# Altium PCB MyProject.PcbDoc
Units mm, origin at the board's own origin, x right, y up, seen from the top; angles counter-clockwise.
Board outline 150.29 x 86.79 mm, 2 copper layers (Top Layer, Bottom Layer); 43 components, 50 nets, 178 pads, 24 vias.
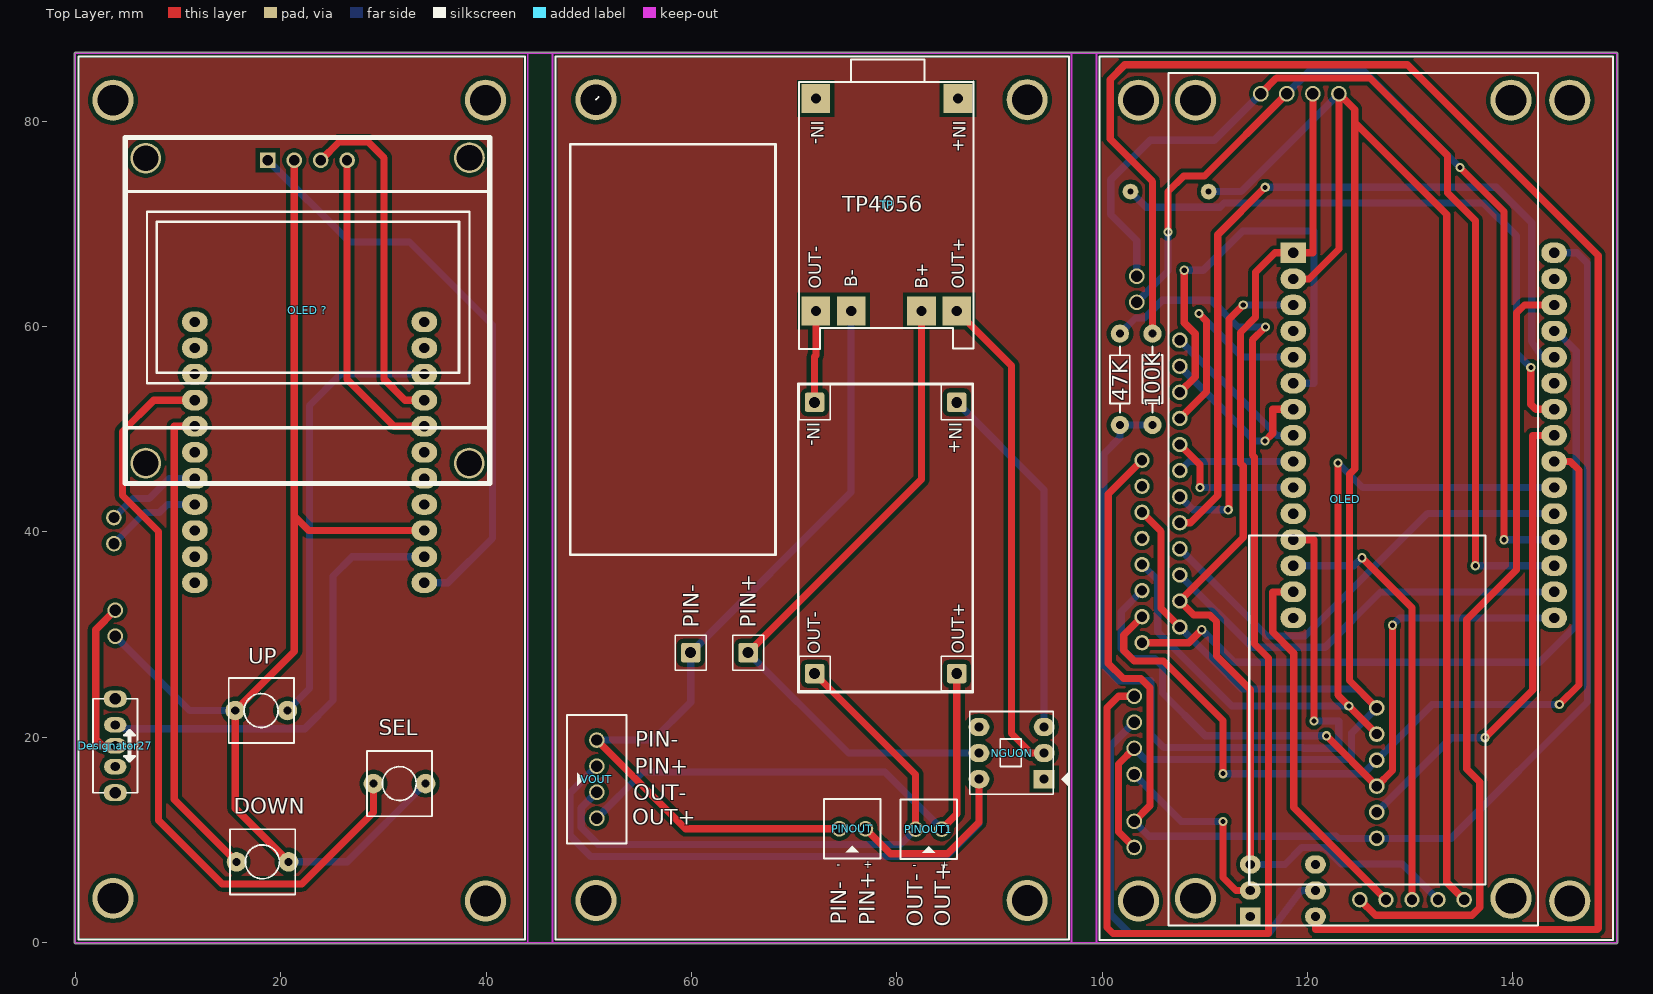
[diagram p0: Top Layer view]
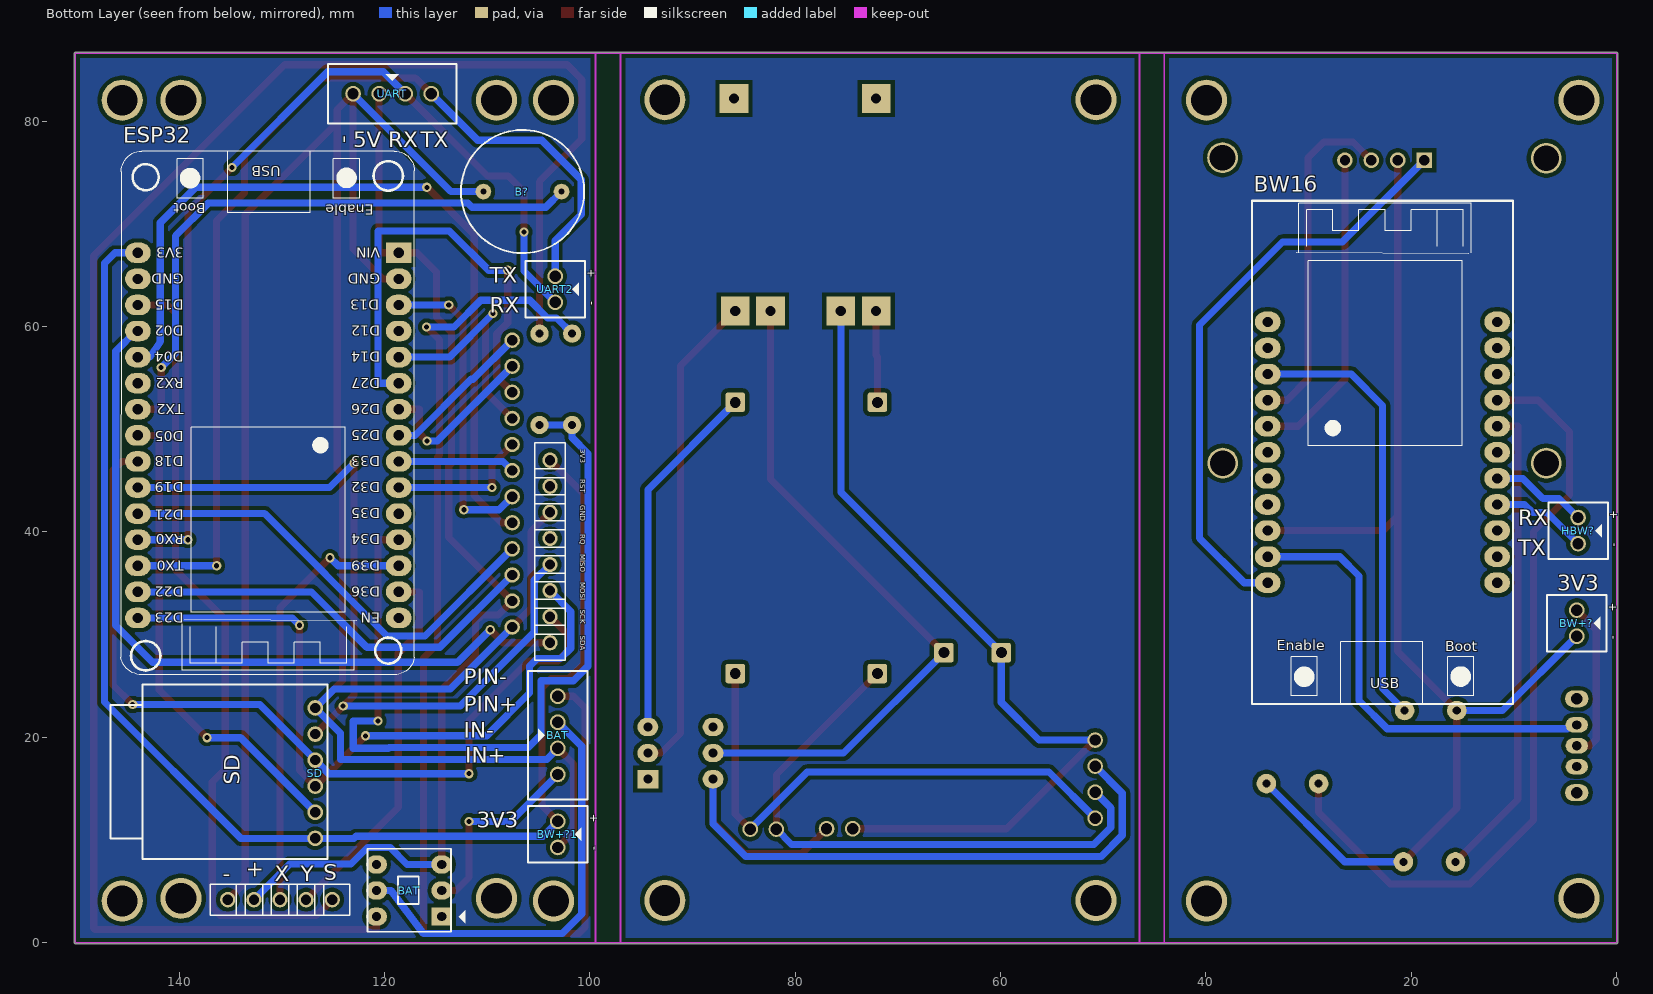
[diagram p1: Bottom Layer view, seen from below]

## Layer stack, top to bottom
Top Solder: solder mask 0.0102, Solder Resist, Dk 3.5
Top Layer: signal copper 0.0356
Dielectric 1: dielectric 0.32, FR-4, Dk 4.8
Bottom Layer: signal copper 0.0356
Bottom Solder: solder mask 0.0102, Solder Resist, Dk 3.5

## Board outline
0,-0.089 cw(c0,0) -0.089,0 -0.089,86.614 cw(c0,86.614) 0,86.703 150.114,86.703 cw(c150.114,86.614) 150.203,86.614 150.203,0 cw(c150.114,0) 150.114,-0.089

## Design rules (kind name [scope] priority, off if disabled: settings)
Clearance [All] p1: gap=0.4 ignorepadtopadclearanceinfootprint=FALSE
DiffPairsRouting [All] p1: maxlimit=0.3 minlimit=0.3 mostfreqgap=0.3 toplayer_minwidth=0.381 toplayer_maxwidth=0.381 toplayer_prefwidth=0.381 bottomlayer_minwidth=0.381 bottomlayer_maxwidth=0.381 bottomlayer_prefwidth=0.381 maxuncoupledlength=12.7
PolygonConnect [All] p1: connectstyle=Relief reliefconductorwidth=0.254 reliefentries=4 polygonreliefangle="90 Angle" airgapwidth=0.254
RoutingCorners [All] p1: cornerstyle=45-Degree minsetback=0 maxsetback=3
RoutingVias [All] p1: holewidth=0.5 width=0.9 viastyle="Through Hole" minholewidth=0.5 minwidth=0.9 maxholewidth=0.5 maxwidth=0.9
SolderMaskExpansion [All] p1: expansion=0.102 istentingtop=FALSE
Width [All] p1: maxlimit=0.7 minlimit=0.7 preferedwidth=0.7
28 further rules are at their usual default settings.

## Classes and differential pairs
component class MyProject: 100K + B? BAT BW16 BW+? DOWN ESP32 HBW? OLED "OLED ?" SD SEL UART UART2 UP X Y

## Components (designator, comment, footprint, x,y, rotation, side; value= is the part's Value field where it differs from the comment)
3V3 "Header 1" HEAD1#1 103.886,46.99 r270 bottom (schematic designator GND)
47K "47K" R1/4W 101.727,59.309 r270 top value="R1/4W - 1K"
100K "100K" R1/4W 104.902,50.419 r90 top value="R1/4W - 1K"
+ "Header 1" HEAD1#1 132.715,4.191 r180 bottom (schematic designator 5V)
- "Header 1" HEAD1#1 135.255,4.191 r180 bottom (schematic designator GND)
B? "BUZZ" BUZZ 110.363,73.152 r180 bottom
BAT "Header 4" "Header 4" 103.124,20.193 r270 bottom
BAT "SW6" SW6 114.427,2.54 r0 bottom
BW16 "BW16-KIT" BW16-KIT 35.514,23.252 r180 bottom
BW+? "HD2" "Header 2" 3.891,31.115 r90 bottom
BW+?1 "HD2" "Header 2" 103.124,10.541 r90 bottom (schematic designator BW+?)
Designator27 "Comment" SW102 3.891,17.145 r90 top
DOWN "SW" SW2 15.702,7.874 r0 top value="SW chip 2 pin" (schematic designator DOWN?)
ESP32 "ESP32_30" ESP32_30 117.094,77.089 r0 bottom
GND "Header 1" HEAD1#2 103.886,41.91 r270 bottom (schematic designator VRX)
HBW? "HD2" "Header 2" 3.764,40.132 r90 bottom
MISO "Header 1" HEAD1#3 103.886,36.83 r270 bottom (schematic designator 5V)
MOSI "Header 1" HEAD1#4 103.886,34.29 r270 bottom (schematic designator VRX)
NGUON "SW6" SW6 94.353,15.923 r180 top
OLED "OLED_BTN" OLED_BTN 142.494,1.651 r90 top
"OLED ?" "OLED 1.3inch" "OLED 1.3inch" 4.86,44.7 r0 top
PIN+ "Header 1" HEAD1#5 65.524,28.242 r270 top
PIN- "Header 1" HEAD1#6 85.844,26.21 r270 top
PIN- "Header 1" HEAD1#7 72.001,26.21 r270 top
PIN- "Header 1" HEAD1#8 85.844,52.626 r270 top
PIN- "Header 1" HEAD1#5 72.001,52.626 r270 top
PIN- "Header 1" HEAD1#5 59.936,28.242 r270 top
PINOUT "HD2" "Header 2" 75.684,11.097 r0 top
PINOUT1 "HD2" "Header 2" 83.108,11.057 r0 top (schematic designator PINOUT)
RQ "Header 1" HEAD1#9 103.886,39.37 r270 bottom (schematic designator GND)
RST "Header 1" HEAD1#10 103.886,44.45 r270 bottom (schematic designator 5V)
S "Header 1" HEAD1#1 125.095,4.191 r180 bottom (schematic designator SW)
SCK "Header 1" HEAD1#11 103.886,31.75 r270 bottom (schematic designator VRY)
SD "SD" SD 125.603,8.128 r90 bottom
SDA "Header 1" HEAD1#12 103.886,29.21 r270 bottom (schematic designator SW)
SEL "SW" SW2 29.037,15.494 r0 top value="SW chip 2 pin" (schematic designator SEL?)
TP "TP4056" TP4056 70.477,57.833 r0 top
UART "Header 4" "Header 4" 119.253,82.677 r0 bottom
UART2 "HD2" "Header 2" 103.378,63.627 r90 bottom
UP "SW" SW2 15.575,22.606 r0 top value="SW chip 2 pin" (schematic designator UP?)
VOUT "Header 4" "Header 4" 50.792,15.923 r270 top
X "Header 1" HEAD1#1 130.175,4.191 r180 bottom (schematic designator VRX)
Y "Header 1" HEAD1#1 127.635,4.191 r180 bottom (schematic designator VRY)

## Footprints (in the part's own frame and the unit in brackets; to place one, negate y for a bottom-side part, rotate by r counter-clockwise, add the part's x,y. Pads: shape width x height; smd on the part's side, far side on the other; paste and mask are expansions set on the pad)
BUZZ [mil]
  round 60 hole 23.62: 1(0,0) 2(299.21,0)
  silkscreen extent -86,-236 386,236
BW16-KIT [mm]
  oval 2.5x2 hole 1: 1(1.524,37.2) 2(1.524,34.66) 3(1.524,32.12) 4(1.524,29.58) 5(1.524,27.04) 6(1.524,24.5) 7(1.524,21.96) 8(1.524,19.42) 9(1.524,16.88) 10(1.524,14.34) 11(1.524,11.8) 12(23.876,11.8) 13(23.876,14.34) 14(23.876,16.88) 15(23.876,19.42) 16(23.876,21.96) 17(23.876,24.5) 18(23.876,27.04) 19(23.876,29.58) 20(23.876,32.12) 21(23.876,34.66) 22(23.876,37.2)
  silkscreen extent 0,0 25.4,49
ESP32_30 [mm] "Microcontoller Board 30 Pins Wifi 2.4GHz BLE 4.2 ESP32-WROOM-32D"
  oval 2.5x2 hole 1: 1(1.524,45.466) 2(1.524,42.926) 3(1.524,40.386) 4(1.524,37.846) 5(1.524,35.306) 6(1.524,32.766) 7(1.524,30.226) 8(1.524,27.686) 9(1.524,25.146) 10(1.524,22.606) 11(1.524,20.066) 12(1.524,17.526) 13(1.524,14.986) 14(1.524,12.446) 16(26.924,45.466) 17(26.924,42.926) 18(26.924,40.386) 19(26.924,37.846) 20(26.924,35.306) 21(26.924,32.766) 22(26.924,30.226) 23(26.924,27.686) 24(26.924,25.146) 25(26.924,22.606) 26(26.924,20.066) 27(26.924,17.526) 28(26.924,14.986) 29(26.924,12.446) 30(26.924,9.906)
  rect 2.5x2 hole 1: 15(1.524,9.906)
  silkscreen extent -0.01,0 28.57,51, body extent 0.07,0.08 28.57,50.98, height 7
HEAD1#1 [mm] "Connector Socket with header, Single-row 1-position, 0.100\" pitch"
  round 1.5 hole 1: 1(0,0)
  silkscreen extent -1.7,-1.5 1.7,1.5, body extent -1.46,-1.27 1.46,1.27, height 10.36
HEAD1#2 [mm] "Connector Socket with header, Single-row 1-position, 0.100\" pitch"
  round 1.5 hole 1: 3(0,0)
  silkscreen extent -1.7,-1.5 1.7,1.5, body extent -1.46,-1.27 1.46,1.27, height 10.36
HEAD1#3 [mm] "Connector Socket with header, Single-row 1-position, 0.100\" pitch"
  round 1.5 hole 1: 5(0,0)
  silkscreen extent -1.7,-1.5 1.7,1.5, body extent -1.46,-1.27 1.46,1.27, height 10.36
HEAD1#4 [mm] "Connector Socket with header, Single-row 1-position, 0.100\" pitch"
  round 1.5 hole 1: 6(0,0)
  silkscreen extent -1.7,-1.5 1.7,1.5, body extent -1.46,-1.27 1.46,1.27, height 10.36
HEAD1#5 [mm] "Connector Socket with header, Single-row 1-position, 0.100\" pitch"
  rrect25% 1.905x1.905 hole 1.067: 1(0,0)
  silkscreen extent -1.7,-1.5 1.7,1.5, body extent -1.46,-1.27 1.46,1.27, height 10.36
HEAD1#6 [mm] "Connector Socket with header, Single-row 1-position, 0.100\" pitch"
  rrect25% 1.905x1.905 hole 1.067: 3(0,0)
  silkscreen extent -1.7,-1.5 1.7,1.5, body extent -1.46,-1.27 1.46,1.27, height 10.36
HEAD1#7 [mm] "Connector Socket with header, Single-row 1-position, 0.100\" pitch"
  rrect25% 1.905x1.905 hole 1.067: 4(0,0)
  silkscreen extent -1.7,-1.5 1.7,1.5, body extent -1.46,-1.27 1.46,1.27, height 10.36
HEAD1#8 [mm] "Connector Socket with header, Single-row 1-position, 0.100\" pitch"
  rrect25% 1.905x1.905 hole 1.067: 2(0,0)
  silkscreen extent -1.7,-1.5 1.7,1.5, body extent -1.46,-1.27 1.46,1.27, height 10.36
HEAD1#9 [mm] "Connector Socket with header, Single-row 1-position, 0.100\" pitch"
  round 1.5 hole 1: 4(0,0)
  silkscreen extent -1.7,-1.5 1.7,1.5, body extent -1.46,-1.27 1.46,1.27, height 10.36
HEAD1#10 [mm] "Connector Socket with header, Single-row 1-position, 0.100\" pitch"
  round 1.5 hole 1: 2(0,0)
  silkscreen extent -1.7,-1.5 1.7,1.5, body extent -1.46,-1.27 1.46,1.27, height 10.36
HEAD1#11 [mm] "Connector Socket with header, Single-row 1-position, 0.100\" pitch"
  round 1.5 hole 1: 7(0,0)
  silkscreen extent -1.7,-1.5 1.7,1.5, body extent -1.46,-1.27 1.46,1.27, height 10.36
HEAD1#12 [mm] "Connector Socket with header, Single-row 1-position, 0.100\" pitch"
  round 1.5 hole 1: 8(0,0)
  silkscreen extent -1.7,-1.5 1.7,1.5, body extent -1.46,-1.27 1.46,1.27, height 10.36
"Header 2" [mil]
  round 60 hole 43.31: 1(50,0) 2(-50,0)
  silkscreen extent -108,-114 108,114
"Header 4" [mil]
  round 60 hole 43.31: 1(150,0) 2(50,0) 3(-50,0) 4(-150,0)
  silkscreen extent -246,-114 246,114
"OLED 1.3inch" [mm] "OLED"
  rect 1.524x1.524 hole 1: 1(13.89,31.5)
  round 1.524 hole 1: 2(16.463,31.5) 3(19.037,31.5) 4(21.61,31.5)
  round 3 hole 2.5: Hole(2,2) Hole(2,31.7) Hole(33.5,2) Hole(33.528,31.75)
  silkscreen extent -0.07,0 35.5,33.7
OLED_BTN [mm]
  round 1.5 hole 1: 1(29.083,34.925) 2(31.623,34.925) 3(34.163,34.925) 4(36.703,34.925) 5(39.243,34.925) 6(41.783,34.925) 7(44.323,34.925) 8(46.863,34.925) 9(49.403,34.925) 10(51.943,34.925) 11(54.483,34.925) 12(57.023,34.925)
  round 4 hole 3: Hole(2.667,33.401) Hole(2.667,2.667) Hole(80.391,2.667) Hole(80.391,33.401)
  silkscreen extent 0.03,0.03 83.03,36.03
R1/4W [mil] "R 1/4W, 2 Pin, 350mil"
  round 70 hole 31: 1(0,0) 2(350,0)
  silkscreen extent 48,-38 302,38, body extent -40,-47 386,47, height 111
SD [mil]
  round 60 hole 39.37: 1(80,45) 2(180,45) 3(280,45) 4(380,45) 5(480,45) 6(580,45)
  silkscreen extent 0,-2 670,830
SW2 [mil] "SW button 2pin, 250x 250 mil"
  round 75 hole 31: 1(0,0) 2(200,0)
  silkscreen extent -25,-125 225,125, body extent -60,-163 255,157, height 257
SW6 [mil] "SW DTDP - 6Pin 260x300x300 mil"
  rect 80x70 hole 35: 1(0,0)
  oval 80x70 hole 35: 2(0,-100) 3(0,-200) 4(250,-200) 5(250,-100) 6(250,0)
  silkscreen extent -90,-260 285,58, body extent -33,-259 281,55, height 532
SW102 [mil] "Switch 102 On Board nho"
  oval 60x85 hole 35: 1(0,0) 2(80,0) 3(160,0)
  oval 65x90 hole 45: 4(260,0) 5(-100,0)
  silkscreen extent -100,-85 260,85
TP4056 [mm]
  rect 2.79x2.79 hole 1: 1(1.651,3.683) 2(5.08,3.683) 3(11.938,3.683) 4(15.367,3.683) 5(15.494,24.384) 6(1.651,24.384)
  silkscreen extent 0,0 17,28.19

## Part data
3V3 + - GND MISO MOSI PIN+ PIN- PIN- PIN- PIN- PIN- RQ RST S SCK SDA X Y: "Header, 1-Pin, Right Angle", Published=6-May-2014, Publisher="Cynetik Group", Revised="Zion Blue"
47K 100K: library part R1/4W, "Resistor 1/4W"
B?: library part Buzz
BAT NGUON: "SW-DTDP - 6 Pin"
BW+? BW+?1 HBW? PINOUT PINOUT1 UART2: library part "Header 2"
DOWN SEL UP: library part SW2, "Switch button 2 pin"
ESP32: "Microcontoller Board 30 Pins Wifi 2.4GHz BLE 4.2 ESP32-WROOM-32D", ComponentLink1Description=Datasheet, ComponentLink1URL=https://www.mouser.com/datasheet/2/891/esp32_wroom_32d_esp32_wroom_32u_datasheet_en-1365844.pdf

## Free pads (board coordinates)
  round 4 hole 3: Hole(3.674,4.318) Hole(3.674,82.042) Hole(39.959,4.064) Hole(39.959,4.064) Hole(39.959,82.042) Hole(39.959,82.042) Hole(39.959,82.042) Hole(50.702,4.112) Hole(50.702,82.09) Hole(92.702,4.112) Hole(92.702,82.09) Hole(103.542,4.064) Hole(103.542,82.042) Hole(139.827,4.318) Hole(139.827,4.318) Hole(139.827,82.042) Hole(145.542,4.064) Hole(145.542,82.042)

## Via types
v1: diameter 0.9, hole 0.5, Top Layer to Bottom Layer, 24 vias

## Nets (pads, with @x,y where several pads share a name; then routed paths per layer and width w, separated by ;. In a path a pad name is that pad's centre, name@x,y a point inside that pad or via, vN(x,y) a via of type N, cw(c..) or ccw(c..) an arc to the next point about the centre after c; other vN are vias at no path point)
3V3: 3V3.1 BW+?1.1 ESP32.30 SD.1 | length 136.6
  Top Layer w0.7: BW+?1.1 104.648,13.335 104.648,24.841 103.768,25.721 102.069,25.721 100.599,27.19 100.599,43.703 3V3.1
  Bottom Layer w0.7: BW+?1.1 104.576,10.359 122.766,10.359 122.965,10.16 SD.1 133.992,10.16 147.277,23.445 147.277,66.159 146.253,67.183 ESP32.30
3V3-1: BW+?.1 Designator27.2 | length 15.5
  Top Layer w0.7: Designator27.2 2.621,19.177 1.986,19.812 1.986,30.48 BW+?.1
3V3-BW: BW16.10 Designator27.3 | length 44.3
  Bottom Layer w0.7: Designator27.3 4.431,21.209 4.812,20.828 22.356,20.828 25.1,23.571 25.1,35.712 26.979,37.592 BW16.10
5V: "OLED ?.1" BW16.11 | length 57.7
  Bottom Layer w0.7: 18.75,76.2 26.725,68.224 32.542,68.224 40.619,60.147 40.619,39.395 36.276,35.052 BW16.11
+5: +.1 BAT.3@114.427,7.62 ESP32.15 OLED.2 UART.2 | length 107.6
  Top Layer w0.7: BAT.3@114.427,7.62 114.427,24.651 111.138,27.94 111.138,31.267 110.49,31.916 108.927,31.916 OLED.2 113.747,39.452 113.747,46.396 113.469,46.674 113.469,59.431 114.941,60.903 114.941,65.284 116.84,67.183 ESP32.15 120.523,67.183 UART.2
  Bottom Layer w0.7: BAT.3@114.427,7.62 117.805,7.62 119.444,9.259 121.666,9.259 123.254,7.671 129.235,7.671 +.1
BW-: "OLED ?.2" BW16.9 BW+?.2 DOWN.2 SEL.2 UP.1 | length 117.3
  Top Layer w0.7: DOWN.2 15.575,13.081 UP.1 21.323,28.354 21.323,41.546 ; 21.323,76.2 21.323,41.546 ; BW16.9 22.737,40.132 21.323,41.546
  Bottom Layer w0.7: BW+?.2 11.13,22.606 UP.1 ; DOWN.2 26.497,7.874 SEL.2
C1: ESP32.26 OLED.5 | length 78.7
  Top Layer w0.7: OLED.5 108.61,40.894 111.269,43.553 111.269,68.953 v1(115.875,73.558)
  Bottom Layer w0.7: v1(115.875,73.558) 138.379,73.558 141.834,70.104 141.834,58.553 142.83,57.023 ESP32.26
C2: ESP32.13 OLED.6 | length 30.7
  Top Layer w0.7: v1(112.276,42.164) 112.369,42.257 112.369,60.731 v1(113.741,62.103)
  Bottom Layer w0.7: OLED.6 108.839,42.164 v1(112.276,42.164) ; v1(113.741,62.103) ESP32.13
C3: ESP32.7 OLED.7 | length 11.4
  Bottom Layer w0.7: OLED.7 108.458,46.863 ESP32.7
C4: ESP32.6 OLED.8 | length 14.1
  Top Layer w0.7: OLED.8 109.535,46.548 v1(109.535,44.323)
  Bottom Layer w0.7: v1(109.535,44.323) ESP32.6
CLK: ESP32.22 SCK.7 SD.4 | length 83.6
  Top Layer w0.7: SCK.7 102.108,29.972 102.108,28.448 103.124,27.432 105.969,27.432 111.76,21.641 v1(111.76,16.459) ; ESP32.22 145.593,46.863 146.431,46.025 146.431,25.095 v1(144.526,23.19)
  Bottom Layer w0.7: v1(111.76,16.459) 125.425,16.459 SD.4 132.156,23.19 v1(144.526,23.19)
CS: ESP32.23 SD.2 | length 47
  Top Layer w0.7: v1(137.287,19.964) 141.935,24.613 141.935,49.403 ESP32.23
  Bottom Layer w0.7: SD.2 134.01,19.964 v1(137.287,19.964)
GND: -.1 B?.1 BAT.2@103.124,18.923 BW+?1.2 ESP32.14 GND.3 OLED.1 SD.6 UART.1 | length 253
  Top Layer w0.7: BW+?1.2 101.6,10.795 101.6,17.399 BAT.2@103.124,18.923 ; GND.3 105.74,40.056 105.74,32.563 OLED.1 ; ESP32.14 120.142,64.643 123.063,67.564 UART.1 124.595,81.145 124.595,79.873 ; SD.6 124.079,25.527 124.079,45.611 124.595,46.126 124.595,79.873 ; -.1 133.553,5.893 133.553,70.914 124.595,79.873
  Bottom Layer w0.7: BAT.2@103.124,18.923 104.205,17.842 124.281,17.842 124.281,20.395 SD.6 124.902,24.704 113.599,24.704 OLED.1 ; B?.1 113.538,73.152 UART.1
GND1: PIN-.4 PINOUT1.2 VOUT.2 | length 57.2
  Top Layer w0.7: PIN-.4 81.838,16.372 PINOUT1.2
  Bottom Layer w0.7: VOUT.2 49.268,13.129 49.268,11.224 50.919,9.573 80.354,9.573 PINOUT1.2
IO34: 47K.2 100K.1 ESP32.4 | length 81.3
  Top Layer w0.7: ESP32.4 120.625,39.243 v1(120.625,21.59)
  Bottom Layer w0.7: 100K.1 47K.2 101.727,49.174 100.197,47.644 100.197,26.918 101.6,25.515 104.75,25.515 104.75,20.244 105.993,19.001 119.564,19.001 119.622,18.942 123.044,18.942 123.044,21.59 v1(120.625,21.59)
MISO: ESP32.21 MISO.5 SD.5 | length 78.8
  Top Layer w0.7: v1(122.961,46.711) 122.961,24.105 v1(124.028,23.038) SD.5
  Bottom Layer w0.7: MISO.5 105.41,35.306 105.41,30.251 112.624,23.038 v1(124.028,23.038) ; v1(122.961,46.711) 125.349,44.323 ESP32.21
MOSI: ESP32.16 MOSI.6 SD.3 | length 70.8
  Top Layer w0.7: v1(121.844,20.142) SD.3 128.27,16.764 v1(128.27,30.912)
  Bottom Layer w0.7: MOSI.6 101.856,32.26 101.856,28.681 102.87,27.667 105.125,27.667 105.868,26.924 105.868,24.307 110.033,20.142 v1(121.844,20.142) ; v1(128.27,30.912) 128.981,31.623 ESP32.16
NetBW16_3: BW16.3 UP.2 | length 43.1
  Bottom Layer w0.7: UP.2 22.814,24.765 22.814,52.324 25.862,55.372 BW16.3
NetBW16_4: "OLED ?.3" BW16.4 | length 33.9
  Top Layer w0.7: 23.896,76.2 25.674,77.978 28.529,77.978 30.078,76.429 30.078,54.864 32.11,52.832 BW16.4
NetBW16_5: "OLED ?.4" BW16.5 | length 30.7
  Top Layer w0.7: 26.47,76.2 26.47,54.864 31.042,50.292 BW16.5
NetBW16_10: 
NetBW16_15: BW16.15 HBW?.2 | length 9.5
  Bottom Layer w0.7: HBW?.2 6.786,41.885 8.183,41.885 8.971,42.672 BW16.15
NetBW16_16: BW16.16 HBW?.1 | length 9.5
  Bottom Layer w0.7: HBW?.1 5.618,43.256 7.193,43.256 9.148,45.212 BW16.16
NetBW16_18: BW16.18 DOWN.1 | length 46.9
  Top Layer w0.7: BW16.18 9.631,50.292 9.631,13.945 DOWN.1
NetBW16_19: BW16.19 SEL.1 | length 76.8
  Top Layer w0.7: BW16.19 7.65,52.832 4.602,49.784 4.602,43.536 8.107,40.03 8.107,11.913 14.305,5.715 22.052,5.715 29.037,12.7 SEL.1
OUT2+: NGUON.3 PIN-.2 | length 35.1
  Bottom Layer w0.7: PIN-.2 94.353,44.117 NGUON.3
OUT+: NGUON.2 TP.4 | length 47.3
  Top Layer w0.7: TP.4 91.178,56.182 91.178,20.368 93.083,18.463 NGUON.2
OUT-: PIN-.1@72.001,52.626 TP.1 | length 8.9
  Top Layer w0.7: PIN-.1@72.001,52.626 72.001,57.071 72.128,57.198 TP.1
PIN2+: NGUON.6 PINOUT.1 VOUT.3 | length 71.7
  Top Layer w0.7: PINOUT.1 79.392,8.659 84.929,8.659 88.003,11.732 NGUON.6
  Bottom Layer w0.7: VOUT.3 48.15,14.551 48.15,10.462 50.207,8.405 84.828,8.405 88.003,11.58 NGUON.6
PIN+: NGUON.5 PIN+.1 TP.3 | length 66.8
  Top Layer w0.7: PIN+.1 82.415,45.133 TP.3
  Bottom Layer w0.7: PIN+.1 75.303,18.463 NGUON.5
PIN-: PIN-.1@59.936,28.242 PINOUT.2 TP.2 VOUT.4 | length 82.4
  Top Layer w0.7: VOUT.4 59.428,11.097 PINOUT.2
  Bottom Layer w0.7: VOUT.4 56.253,19.733 59.936,23.416 59.936,28.242 75.557,43.863 TP.2
R1: ESP32.11 OLED.9 | length 22.5
  Top Layer w0.7: OLED.9 110.169,53.654 110.169,60.519 v1(109.423,61.265)
  Bottom Layer w0.7: v1(109.423,61.265) 113.665,57.023 ESP32.11
R2: ESP32.10 OLED.10 | length 44
  Top Layer w0.7: OLED.10 109.069,55.094 109.069,59.309 108.001,60.377 v1(108.001,65.481)
  Bottom Layer w0.7: v1(108.001,65.481) 109.849,65.481 113.684,69.317 120.625,69.317 120.625,54.483 ESP32.10
R3: ESP32.9 OLED.11 | length 16.7
  Top Layer w0.7: v1(115.849,48.844) 116.611,49.606 116.611,51.943 ESP32.9
  Bottom Layer w0.7: OLED.11 114.859,48.844 v1(115.849,48.844)
R4: ESP32.8 OLED.12 | length 14.9
  Bottom Layer w0.7: OLED.12 111.382,54.861 111.572,54.861 117.03,49.403 ESP32.8
RFID: ESP32.27 SDA.8 | length 75.3
  Top Layer w0.7: SDA.8 108.433,29.21 v1(109.703,30.48)
  Bottom Layer w0.7: v1(109.703,30.48) 112.878,27.305 142.596,27.305 146.177,30.886 146.177,57.589 144.203,59.563 ESP32.27
RX: ESP32.19 UART2.2 UART.3 | length 92.1
  Top Layer w0.7: v1(106.426,69.215) 106.426,73.152 107.938,74.664 109.97,74.664 UART.3 ; v1(134.849,75.489) 139.141,71.196 v1(139.141,39.243)
  Bottom Layer w0.7: UART2.2 106.426,65.405 v1(106.426,69.215) ; UART.3 120.117,84.811 125.527,84.811 v1(134.849,75.489) ; v1(139.141,39.243) ESP32.19
RX2: ESP32.25
SCL: ESP32.17 OLED.3 | length 41.6
  Bottom Layer w0.7: OLED.3 114.61,28.773 121.718,28.773 127.108,34.163 ESP32.17
SDA: ESP32.20 OLED.4 | length 44.9
  Bottom Layer w0.7: OLED.4 116.05,29.873 119.764,29.873 131.674,41.783 ESP32.20
SW: ESP32.28 S.1 | length 77.1
  Top Layer w0.7: S.1 126.619,2.667 136.017,2.667 136.779,3.429 136.779,15.646 135.509,16.916 135.509,31.471 140.36,36.322 140.36,61.341 141.122,62.103 ESP32.28
TX: ESP32.18 UART2.1 UART.4 | length 99.2
  Top Layer w0.7: UART.4 116.967,84.201 126.086,84.201 133.649,76.638 133.649,73.019 136.347,70.32 v1(136.347,36.703)
  Bottom Layer w0.7: UART2.1 103.378,68.386 100.838,70.926 100.838,74.295 104.692,78.149 110.915,78.149 UART.4 ; v1(136.347,36.703) ESP32.18
TX2: B?.2 ESP32.24 | length 59.2
  Top Layer w0.7: v1(141.75,56.015) 141.75,52.433 142.24,51.943 ESP32.24
  Bottom Layer w0.7: B?.2 104.287,71.628 111.481,71.628 111.871,72.019 137.176,72.019 140.36,68.834 140.36,57.404 v1(141.75,56.015)
Vin2: BAT.1@103.124,16.383 BAT.2@114.427,5.08 | length 19.2
  Top Layer w0.7: v1(111.76,11.811) 111.76,6.35 113.03,5.08 BAT.2@114.427,5.08
  Bottom Layer w0.7: BAT.1@103.124,16.383 107.696,11.811 v1(111.76,11.811)
Vout: PIN-.3 PINOUT1.1 VOUT.1 | length 53.5
  Top Layer w0.7: PINOUT1.1 85.844,12.522 PIN-.3
  Bottom Layer w0.7: VOUT.1 55.287,16.609 78.827,16.609 PINOUT1.1
VRX: ESP32.3 X.1 | length 42.3
  Top Layer w0.7: v1(125.298,37.49) 130.175,32.614 X.1
  Bottom Layer w0.7: ESP32.3 124.511,36.703 v1(125.298,37.49)
VRY: ESP32.2 Y.1 | length 36.5
  Top Layer w0.7: ESP32.2 116.611,34.163 116.611,30.251 118.669,28.194 118.669,13.157 Y.1
ĐoPin1+: 100K.2 BAT.6 | length 176.6
  Top Layer w0.7: 100K.2 104.902,74.143 100.787,78.257 100.787,84.074 102.21,85.496 129.743,85.496 148.311,66.929 148.311,1.372 148.234,1.295 120.777,1.295 BAT.6
ĐoPin+: BAT.3@103.124,21.463 BAT.5 | length 42.5
  Bottom Layer w0.7: BAT.3@103.124,21.463 100.787,19.126 100.787,2.794 102.692,0.889 116.205,0.889 119.38,5.08 BAT.5
ĐoPin-: 47K.1 BAT.4@103.124,24.003 | length 117.3
  Top Layer w0.7: BAT.4@103.124,24.003 101.6,24.003 100.482,22.885 100.482,1.473 101.067,0.889 116.205,0.889 116.205,27.735 114.847,29.093 114.847,47.279 114.63,47.496 114.63,58.684 v1(115.9,59.954)
  Bottom Layer w0.7: 47K.1 103.251,60.833 104.115,60.833 105.848,62.566 110.623,62.566 113.236,59.954 v1(115.9,59.954)
pads on no net: "OLED ?.Hole" BAT.1@114.427,2.54 BAT.4@120.777,7.62 BW16.1 BW16.2 BW16.6 BW16.7 BW16.8 BW16.12 BW16.13 BW16.14 BW16.17 BW16.20 BW16.21 BW16.22 Designator27.1 Designator27.4 Designator27.5 ESP32.1 ESP32.5 ESP32.12 ESP32.29 NGUON.1 NGUON.4 OLED.Hole RQ.4 RST.2 TP.5 TP.6

## Polygon pours and split planes (outlines as drawn)
no net on Top Layer "NONET_L-01_P-001" (solid, pour order 3): 99.441,86.614 99.441,0 150.114,0 150.114,86.614
no net on Top Layer "NONET_L-01_P-001" (solid, pour order 2): 46.482,86.614 46.482,0 97.028,0 97.028,86.614
no net on Top Layer "NONET_L-01_P-001" (solid, pour order 1): 0,0 44.069,0 44.069,86.614 0,86.614
no net on Bottom Layer "NONET_L-01_P-001" (solid, pour order 6): 99.441,0 99.441,86.614 150.114,86.614 150.114,0
no net on Bottom Layer "NONET_L-01_P-001" (solid, pour order 5): 46.482,0 46.482,86.614 97.028,86.614 97.028,0
no net on Bottom Layer "NONET_L-01_P-001" (solid, pour order 4): 0,0 0,86.614 44.069,86.614 44.069,0

## Keep-outs
Keep-Out Layer:
  lines w0.178: 44.069,0 44.069,86.614 ; 46.482,0 46.482,86.614 ; 97.028,0 97.028,86.614 ; 99.441,0 99.441,86.614 ; 0,0 150.114,0 150.114,86.614 0,86.614 0,0

## Silkscreen, mask and mechanical layers (free items; w line width, h text height)
Top Overlay:
  lines w0.178: 50.702,82.09 50.956,82.344
  lines w0.2: 0.335,0.297 0.335,86.297 43.797,86.297 43.797,0.297 0.335,0.297 ; 46.766,0.302 46.766,86.302 96.766,86.302 96.766,0.302 46.766,0.302 ; 99.733,0.281 99.733,86.281 149.733,86.281 149.733,0.281 99.733,0.281
  lines w0.254: 48.191,37.767 68.191,37.767 68.191,77.767 48.191,77.767 48.191,37.767 ; 70.396,24.408 87.396,24.408 87.396,54.408 70.396,54.408 70.396,24.408
  text "IN-" at 71.28,50.676 h1.2 r270
  text "IN+" at 85.123,50.676 h1.2 r270
  text "OUT+" at 86.557,28.136 h1.2 r90
  text "OUT-" at 72.547,28.099 h1.2 r90
  text "PIN-" at 54.538,19.07 h1.52
  text "PIN+" at 54.475,16.431 h1.52
  text "OUT-" at 54.348,13.891 h1.52
  text "OUT+" at 54.221,11.478 h1.52
  text "PIN-" at 75.077,1.763 h1.52 r90
  text "PIN+" at 77.843,1.699 h1.52 r90
  text "OUT-" at 82.542,1.572 h1.52 r90
  text "OUT+" at 85.209,1.572 h1.52 r90
Bottom Overlay:
  text "-" at 123.317,77.851 h1.52 r270
  text "TX" at 116.459,77.47 h1.52
  text "RX" at 119.634,77.47 h1.52
  text "5V" at 123.063,77.47 h1.52
  text "TX" at 109.728,64.262 h1.52
  text "RX" at 109.728,61.341 h1.52
  text "RX" at 9.606,40.64 h1.52
  text "TX" at 9.606,37.719 h1.52
  text "3V3" at 5.796,34.29 h1.52
  text "PIN-" at 112.268,25.146 h1.52
  text "PIN+" at 112.268,22.479 h1.52
  text "IN-" at 112.268,19.939 h1.52
  text "IN+" at 112.141,17.526 h1.52
  text "3V3" at 110.998,11.176 h1.52

## Text inside footprints (layer, text, board x,y; h text height)
BW16: Bottom Overlay "USB" at 24.014,24.764 h1; Bottom Overlay "Boot" at 16.718,28.368 h1; Bottom Overlay "Enable" at 33.101,28.495 h1
BW+?: Bottom Overlay "-" at 0.054,29.564 h0.76 r270; Bottom Overlay "+" at 0.054,32.231 h0.76 r270
BW+?1: Bottom Overlay "-" at 99.287,8.99 h0.76 r270; Bottom Overlay "+" at 99.287,11.657 h0.76 r270
ESP32: Bottom Overlay "RX0" at 139.573,39.751 h1 r180; Bottom Overlay "TX0" at 139.573,37.211 h1 r180; Bottom Overlay "D22" at 139.573,34.671 h1 r180; Bottom Overlay "D21" at 139.573,42.164 h1 r180; Bottom Overlay "D18" at 139.573,47.371 h1 r180; Bottom Overlay "D05" at 139.573,49.784 h1 r180; Bottom Overlay "D19" at 139.573,44.831 h1 r180; Bottom Overlay "D25" at 120.396,49.911 h1 r180; Bottom Overlay "D33" at 120.396,47.371 h1 r180; Bottom Overlay "D35" at 120.396,42.291 h1 r180; Bottom Overlay "D34" at 120.396,39.751 h1 r180; Bottom Overlay "D32" at 120.396,44.831 h1 r180; Bottom Overlay "D26" at 120.396,52.451 h1 r180; Bottom Overlay "D13" at 120.523,62.611 h1 r180; Bottom Overlay "D27" at 120.396,54.991 h1 r180; Bottom Overlay "D14" at 120.396,57.531 h1 r180; Bottom Overlay "GND" at 120.396,65.151 h1 r180; Bottom Overlay "VIN" at 120.396,67.691 h1 r180; Bottom Overlay "D12" at 120.396,60.071 h1 r180; Bottom Overlay "D39" at 120.396,37.211 h1 r180; Bottom Overlay "3V3" at 139.573,67.691 h1 r180; Bottom Overlay "D04" at 139.573,57.531 h1 r180; Bottom Overlay "GND" at 139.573,65.151 h1 r180; Bottom Overlay "D02" at 139.573,60.071 h1 r180; Bottom Overlay "D15" at 139.573,62.611 h1 r180; Bottom Overlay "RX2" at 139.573,54.991 h1 r180; Bottom Overlay "TX2" at 139.573,52.451 h1 r180; Bottom Overlay "D36" at 120.396,34.671 h1 r180; Bottom Overlay "D23" at 139.573,32.131 h1 r180; Bottom Overlay "EN" at 120.396,32.131 h1 r180; Bottom Overlay "USB" at 130.118,75.613 h1 r180; Bottom Overlay "Boot" at 137.414,72.009 h1 r180; Bottom Overlay "Enable" at 121.031,71.882 h1 r180
HBW?: Bottom Overlay "-" at -0.073,38.581 h0.76 r270; Bottom Overlay "+" at -0.073,41.248 h0.76 r270
PINOUT: Top Overlay "+" at 76.8,7.26 h0.76; Top Overlay "-" at 74.133,7.26 h0.76
PINOUT1: Top Overlay "-" at 81.557,7.22 h0.76; Top Overlay "+" at 84.224,7.22 h0.76
TP: Top Overlay "OUT-" at 72.636,63.675 h1.2 r90; Top Overlay "OUT+" at 86.556,63.693 h1.2 r90; Top Overlay "B-" at 76.142,63.82 h1.2 r90; Top Overlay "B+" at 83,63.693 h1.2 r90; Top Overlay "IN-" at 71.669,80.04 h1.2 r270; Top Overlay "IN+" at 85.512,80.04 h1.2 r270
UART2: Bottom Overlay "+" at 99.541,64.743 h0.76 r270; Bottom Overlay "-" at 99.541,62.076 h0.76 r270